# EAGLE board esplash (EAGLE 9.6.2)
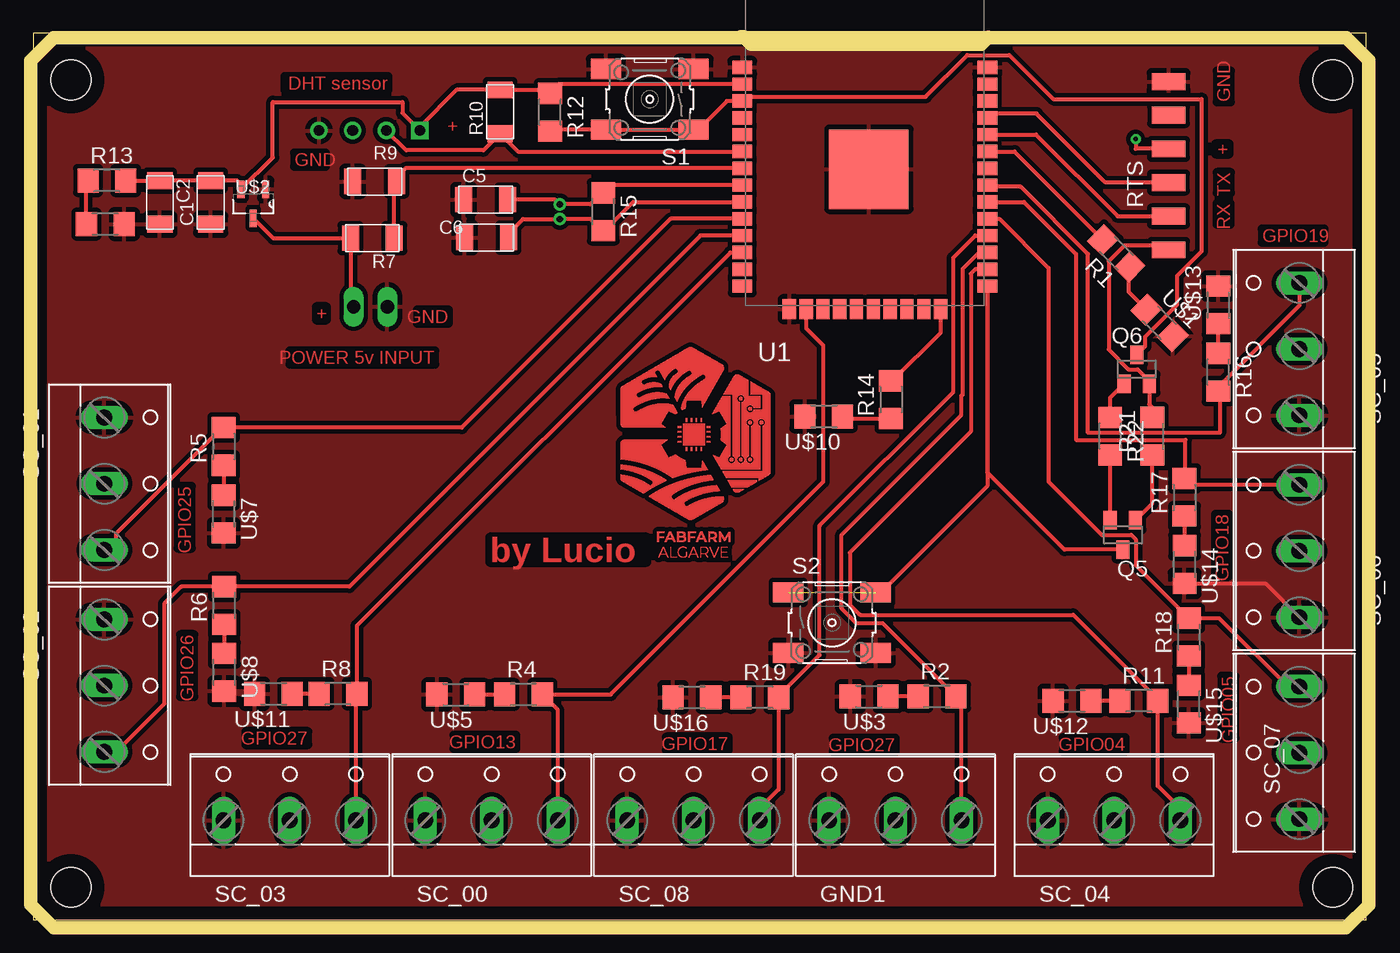
[diagram p0: board, top side]
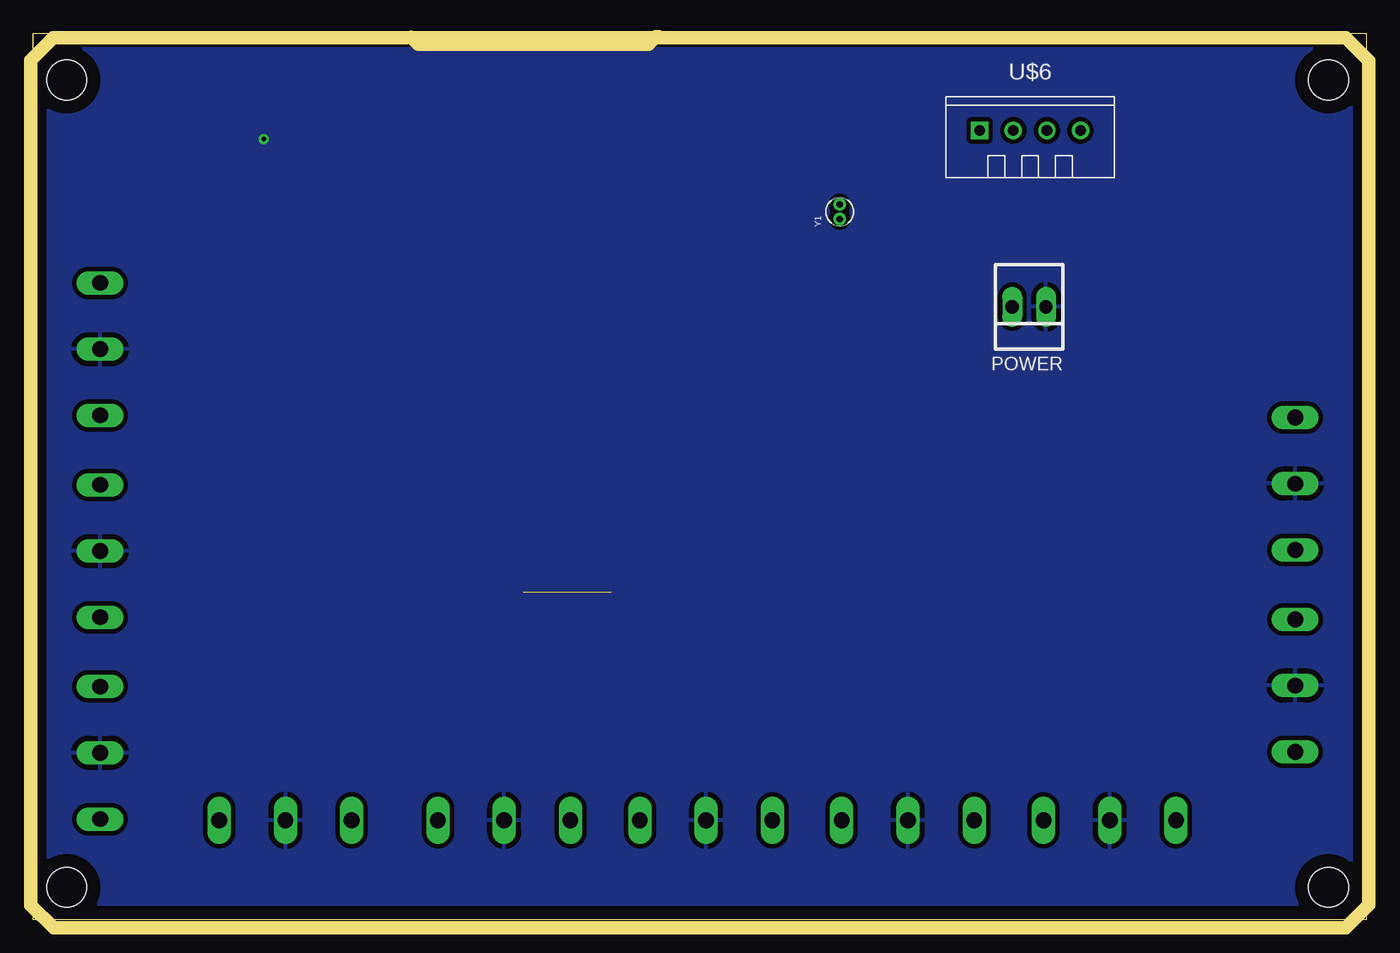
[diagram p1: board, bottom side, seen from below]

Size 100.64 x 66.94 mm. Coordinates in mm from the lower left corner, seen from the top.
Outline: 0,0 100.64,0 100.64,66.94 0,66.94 0,0
Copper layers (1*16): Top 0.035mm / dielectric 1.5mm / Bottom 0.035mm
Design rules "default *": minimum track width 12mil, minimum drill 0.35mm, track to track 13mil, track to pad 13mil, pad to pad 13mil, via to via 13mil, smd to smd 13mil, copper to edge 40mil, drill to drill 6mil, minimum pad ring 10mil, minimum via ring 8mil, stop-mask expansion 4mil, vias tented up to drill 0mil, thermal gap 15mil
Holes 3 mm at 2.86,63.41 98.11,63.41 98.11,2.45 2.86,2.44
Milling: 12 lines

## Footprints (pad centres in the part's own frame; a part is rotated, then mirrored left to right if it is on the bottom)
C1206FAB = smd 1.27 x 1.905: 1 -1.651,0; 2 1.651,0
W237-103 = drill 1.194 long: 1 -5,-1.29; 2 0,-1.29; 3 5,-1.29
22-23-2021 = drill 1 long: 1 -1.27,0; 2 1.27,0
SOT23 = smd 1 x 1.4: 1 -0.95,-1.1; 2 0.95,-1.1; 3 0,1.1
R1206 = smd 1.6 x 1.803: 1 -1.422,0; 2 1.422,0
R1206FAB = smd 1.27 x 1.905: 1 -1.651,0; 2 1.651,0
1X06SMD = smd 2.54 x 1.27: 1 0,6.35; 2 0,3.81; 3 0,1.27; 4 0,-1.27; 5 0,-3.81; 6 0,-6.35
6MM_SWITCH = smd 2.286 x 1.524: 1 -3.302,2.286; 2 3.302,2.286; 3 -3.302,-2.286; 4 3.302,-2.286
ESP-WROOM-32 = smd 1.5 x 1: 1 -9.25,7; 2 -9.25,5.73; 3 -9.25,4.46; 4 -9.25,3.19; 5 -9.25,1.92; 6 -9.25,0.65; 7 -9.25,-0.62; 8 -9.25,-1.89; 9 -9.25,-3.16; 10 -9.25,-4.43; 11 -9.25,-5.7; 12 -9.25,-6.97; 13 -9.25,-8.24; 14 -9.25,-9.51; 25 9.25,-9.51; 26 9.25,-8.24; 27 9.25,-6.97; 28 9.25,-5.7; 29 9.25,-4.43; 30 9.25,-3.16; 31 9.25,-1.89; 32 9.25,-0.62; 33 9.25,0.65; 34 9.25,1.92; 35 9.25,3.19; 36 9.25,4.46; 37 9.25,5.73; 38 9.25,7 | smd 1 x 1.5: 15 -5.7,-11.25; 16 -4.43,-11.25; 17 -3.16,-11.25; 18 -1.89,-11.25; 19 -0.62,-11.25; 20 0.65,-11.25; 21 1.92,-11.25; 22 3.19,-11.25; 23 4.46,-11.25; 24 5.73,-11.25 | smd 6 x 6: GND 0.3,-0.7
LED1206 = smd 1.6 x 1.803: 1 -1.422,0; 2 1.422,0
SOT95P237X112-3N = smd 1.321 x 0.559: 1 -1.092,0.94; 2 -1.092,-0.94 | smd 1.321 x 0.508: 3 1.092,0
TEMP-HUM-SENSOR-DHT11 = drill 0.8 square: 1 -3.81,0 | drill 0.8: 2 -1.27,0; 3 1.27,0; 4 3.81,0
XTAL_ECS-.327-12.5-13X = drill 0.46 pad 0.86: 1 -0.55,0; 2 0.55,0

## Placement (x,y rotation side)
C1  100nF  [C1206FAB]  13.41,54.16 90 top
C2  100uF  [C1206FAB]  9.57,54.16 270 top
C5  15pf  [C1206FAB]  34.15,54.38 0 top
C6  15pf  [C1206FAB]  34.23,51.5 0 top
GND1  SC  [W237-103]  65.09,8.8 0 top
POWER  22-23-2021  [22-23-2021]  25.46,46.28 180 bottom
Q5  BCX70SMD  [SOT23]  82.25,29.06 180 top
Q6  BCX70SMD  [SOT23]  83.31,41.57 0 top
R1  100ohm  [R1206]  81.76,50.33 135 top
R2  100ohm  [R1206]  68.24,16.87 0 top
R4  100ohm  [R1206]  37.01,17.02 0 top
R5  100ohm  [R1206]  14.39,35.74 90 top
R6  100ohm  [R1206]  14.42,23.73 90 top
R7  1.2Mohm  [R1206FAB]  25.61,51.46 180 top
R8  100ohm  [R1206]  23.01,17.07 0 top
R9  1.5Mohm  [R1206FAB]  25.78,55.74 0 top
R10  10K  [R1206FAB]  35.25,61 90 top
R11  100ohm  [R1206]  83.46,16.54 0 top
R12  10k  [R1206]  39.02,60.97 270 top
R13  100ohm  [R1206]  5.57,55.82 0 top
R14  100ohm  [R1206]  64.76,39.28 90 top
R15  10k  [R1206]  43.04,53.46 270 top
R16  100ohm  [R1206]  89.46,41.35 270 top
R17  100ohm  [R1206]  86.91,31.9 90 top
R18  100ohm  [R1206]  87.23,21.34 90 top
R19  100ohm  [R1206]  54.86,16.81 0 top
R21  10k  [R1206]  84.47,36.51 90 top
R22  10k  [R1206]  81.3,36.51 270 top
RTS  FTDI-SMD-HEADER  [1X06SMD]  85.71,56.93 0 top
S1  Reset  [6MM_SWITCH]  46.54,61.95 180 top
S2  GPIO0 Button  [6MM_SWITCH]  60.31,22.43 0 top
SC_00  SC  [W237-103]  34.61,8.8 0 top
SC_01  SC  [W237-103]  6.67,32.93 270 top
SC_02  SC  [W237-103]  6.67,17.69 270 top
SC_03  SC  [W237-103]  19.37,8.8 0 top
SC_04  SC  [W237-103]  81.6,8.8 0 top
SC_05  SC  [W237-103]  94.3,43.09 90 top
SC_06  SC  [W237-103]  94.3,27.85 90 top
SC_07  SC  [W237-103]  94.3,12.61 90 top
SC_08  SC  [W237-103]  49.85,8.8 0 top
U1  ESP-WROOM-32  [ESP-WROOM-32]  62.78,57.36 0 top
U$1  LED  [LED1206]  85.02,45.08 315 top
U$2  MCP1700T-3302E/TT  [SOT95P237X112-3N]  16.61,54.06 270 top
U$3  LED  [LED1206]  63.1,16.86 180 top
U$5  LED  [LED1206]  31.9,17.01 180 top
U$6  TEMP-HUM-SENSOR-DHT11  [TEMP-HUM-SENSOR-DHT11]  25.39,59.6 0 bottom
U$7  LED  [LED1206]  14.39,30.64 270 top
U$8  LED  [LED1206]  14.43,18.69 270 top
U$9  LED  [LED1206]  5.45,52.52 0 top
U$10  LED  [LED1206]  59.68,38.01 180 top
U$11  LED  [LED1206]  18.14,17.07 180 top
U$12  LED  [LED1206]  78.41,16.54 180 top
U$13  LED  [LED1206]  89.46,46.43 90 top
U$14  LED  [LED1206]  86.92,26.82 270 top
U$15  LED  [LED1206]  87.22,16.29 270 top
U$16  LED  [LED1206]  49.72,16.8 180 top
Y1  ECS-.327-12.5-13X  [XTAL_ECS-.327-12.5-13X]  39.75,53.46 90 bottom

## Library data of the parts
C1 C2 C5 C6 R1 R2 R4-R19 R21 R22 RTS S1 S2 U$1 U$3 U$5 U$7-U$16 = fab
GND1 SC_00 SC_01-SC_08 = con-wago-500; MPN: 237-103; OC_FARNELL: unknown; OC_NEWARK: 18M7116
POWER = con-molex; MF: MOLEX; MPN: 22-23-2021; OC_FARNELL: 1462926; OC_NEWARK: 25C3832
Q5 Q6 = transistor
U1 = esp32
U$2 = MCP1700T-3302E_TT; ARROW_AMERICAS-PURCHASE-URL: https://snapeda.com/shop?store=Arrow+Americas&id=4791194; AVAILABILITY: Unavailable; DESCRIPTION: IC REG LINEAR 3.3V 250MA SOT23-3; DIGIKEY-PURCHASE-URL: https://snapeda.com/shop?store=DigiKey&id=4791194; MF: Microchip Technology; MOUSER-PURCHASE-URL: https://snapeda.com/shop?store=Mouser&id=4791194; MP: MCP1700T-3302E/TT; PACKAGE: None; PRICE: None
U$6 = diy-modules
Y1 = ECS-.327-12.5-13X; AVAILABILITY: Unavailable; DESCRIPTION: 32.768kHz ±20ppm Crystal 12.5pF 35 kOhms Cylindrical Can, Radial; MF: ECS Inc.; MP: ECS-.327-12.5-13X; PACKAGE: Cylindrical Can Radial ECS International; PRICE: None

## Nets
3V3: C1.2 C2.1 R10.2 R12.1 R13.2 U1.2 U$2.2 U$6.1
32K_XN: C6.2 R15.2 U1.9 Y1.1
32K_XP: C5.2 R15.1 U1.8 Y1.2
CHIP_PU: Q6.3 R12.2 S1.1 S1.2 U1.3
DTR: Q5.2 R22.2
GND: C1.1 C2.2 C5.1 C6.1 GND1.1 POWER.2 R9.1 RTS.1 S1.3 S1.4 S2.3 S2.4 SC_00.1 SC_01.1 SC_02.1 SC_03.1 SC_04.1 SC_05.1 SC_06.1 SC_07.1 SC_08.1 U1.1 U1.15 U1.38 U1.GND U$1.2 U$2.1 U$3.2 U$5.2 U$6.4 U$7.2 U$8.2 U$9.2 U$10.2 U$11.2 U$12.2 U$13.2 U$14.2 U$15.2 U$16.2
GPIO0: Q5.3 S2.1 S2.2 U1.25
GPIO1/TXD0: RTS.4 U1.35
GPIO02: R14.2 U1.24
GPIO3/RXD0: RTS.5 U1.34
GPIO4: R11.2 SC_04.3 U1.26
GPIO05/VALVE_RELAY07: R18.2 SC_07.3 U1.29
GPIO12: U1.14
GPIO13/PUMP_RELAY: R4.2 SC_00.3 U1.16
GPIO14: U1.13
GPIO15: U1.23
GPIO16/CURRENT_SENSE: GND1.3 R2.2 U1.27
GPIO17/VALVE_RELAY08: R19.2 SC_08.3 U1.28
GPIO18/VALVE_RELAY06: R17.2 SC_06.3 U1.30
GPIO19/VALVE_RELAY05: R16.2 SC_05.3 U1.31
GPIO21/VALVE_RELAY04: R1.2 U1.33
GPIO22: U1.36
GPIO23: U1.37
GPIO25/VALVE_RELAY01: R5.2 SC_01.3 U1.10
GPIO26/VALVE_RELAY02: R6.2 SC_02.3 U1.11
GPIO27/VALVE_RELAY03: R8.2 SC_03.3 U1.12
GPIO34/DHT: R10.1 U1.6 U$6.2
GPIO35/BATTVOLT: R7.1 R9.2 U1.7
GPIO36: U1.4
GPIO39: U1.5
N$2: R1.1 U$1.1
N$5: R2.1 U$3.1
N$10: R14.1 U$10.1
N$13: R4.1 U$5.1
N$15: R5.1 U$7.1
N$17: R6.1 U$8.1
N$19: R8.1 U$11.1
N$21: R11.1 U$12.1
N$23: R16.1 U$13.1
N$25: R13.1 U$9.1
N$26: Q5.1 R21.1
N$27: R17.1 U$14.1
N$29: R18.1 U$15.1
N$31: R19.1 U$16.1
N$34: Q6.1 R22.1
RTS: Q6.2 R21.2 RTS.6
VCC: GND1.2 POWER.1 R7.2 RTS.3 SC_00.2 SC_01.2 SC_02.2 SC_03.2 SC_04.2 SC_05.2 SC_06.2 SC_07.2 SC_08.2 U$2.3

## Tracks (layer width: path | path; a pad name or v marks a point on that pad's centre or on a via)
3V3
  Top 0.305: R13.2 C2.1 | C2.1 C1.2 15.39,55.81 15.67,55.53 U$2.2 18.08,57.56 18.08,61.73 27.89,61.73 27.89,60.9 U$6.1 29.2,59.89 31.97,62.66 R10.2 38.75,62.66 R12.1 39.71,63.09 U1.2 | C2.1
32K_XN
  Top 0.305: C6.2 35.88,51.82 36.98,52.91 Y1.1 42.06,52.91 42.94,52.04 R15.2 43.14,52.04 45.3,54.2 U1.9
32K_XP
  Top 0.305: U1.8 43.62,55.47 R15.1 42.94,54.89 42.06,54.01 Y1.2 39.39,54.38 C5.2
CHIP_PU
  Top 0.305: R12.2 39.13,59.67 S1.2 S1.1 50.22,59.67 52.38,61.82 U1.3 53.84,62.13 58.28,62.13 58.28,62.14 67.36,62.14 70.51,65.29 73.69,65.29 77.01,61.96 88.2,61.96 88.2,50.45 86.33,48.59 86.33,46.42 83.92,44.01 83.92,43.29 Q6.3
DTR
  Top 0.305: Q5.2 R22.2
GND
  Top 0.305: U$14.2 93.04,25.4 SC_06.1
  pour Top: -8.57,76.75 -8.57,-10.25 113.96,-10.25 113.96,76.75
GPIO0  (1 unrouted)
  Top 0.305: S2.2 63.99,24.71 72.03,32.75 U1.25 72.03,33.78 77.85,27.96 Q5.3
GPIO1/TXD0
  Top 0.305: 72.35,60.87 U1.35 72.35,60.87 | RTS.4 80.94,55.66 75.74,60.87 72.35,60.87
GPIO02
  Top 0.305: R14.2 64.86,40.7 68.51,44.35 U1.24
GPIO3/RXD0
  Top 0.305: U1.34 75.71,59.28 81.86,53.12 RTS.5
GPIO4
  Top 0.305: U1.26 71.13,49.12 70.79,48.77 70.79,36.86 61.65,27.73 61.65,23.78 62.42,23.02 78.51,23.02 84.88,16.65 R11.2 84.88,10.11 86.6,8.4 SC_04.3
GPIO05/VALVE_RELAY07
  Top 0.305: SC_07.3 94.69,17.61 89.53,22.77 R18.2 83.23,26.76 83.23,28.72 82.89,29.06 80.66,29.06 76.65,33.08 76.65,49.21 72.93,52.93 U1.29
GPIO13/PUMP_RELAY
  Top 0.305: U1.16 58.35,44.66 59.64,43.37 59.64,33.06 43.6,17.02 R4.2 39.61,15.84 SC_00.3
GPIO16/CURRENT_SENSE
  Top 0.305: GND1.3 70.09,16.44 R2.2 64.14,22.39 62.15,22.39 61.02,23.52 61.02,29.06 70.07,38.11 70.07,39.56 70.15,39.64 70.15,49.13 71.4,50.39 U1.27
GPIO17/VALVE_RELAY08
  Top 0.305: U1.28 71.12,51.66 69.45,49.98 69.45,39.84 59.36,29.75 59.36,19.99 56.28,16.91 R19.2 56.28,9.84 54.85,8.4 SC_08.3
GPIO18/VALVE_RELAY06
  Top 0.305: SC_06.3 86.98,32.85 86.98,33.39 | 86.98,33.39 86.98,36.24 78.72,36.24 78.72,50.26 74.79,54.2 U1.30 | R17.2 86.98,33.39
GPIO19/VALVE_RELAY05
  Top 0.305: SC_05.3 95.59,46.37 89.56,40.35 89.56,39.82 | 89.56,39.82 89.56,36.76 79.63,36.76 79.63,50.27 74.55,55.35 72.03,55.35 U1.31 | R16.2 89.56,39.82
GPIO21/VALVE_RELAY04
  Top 0.305: U1.33 74.08,58.01 R1.2 | R1.2
GPIO25/VALVE_RELAY01
  Top 0.305: SC_01.3 6.27,27.93 6.27,29.15 14.28,37.17 R5.2 32.36,37.17 48.12,52.93 U1.10
GPIO26/VALVE_RELAY02
  Top 0.305: U1.11 50.37,51.66 23.87,25.16 R6.2 11.18,25.16 9.89,23.87 9.89,16.31 6.27,12.69 SC_02.3
GPIO27/VALVE_RELAY03
  Top 0.305: U1.12 52.62,50.39 24.43,22.2 R8.2 24.37,17 24.37,8.4 SC_03.3
GPIO34/DHT
  Top 0.305: U1.6 36.6,58.01 R10.1 33.99,58.09 28.16,58.09 U$6.2
GPIO35/BATTVOLT
  Top 0.305: U1.7 28.11,56.74 27.43,56.06 R9.2 27.26,55.57 R7.1
N$2
  Top 0.305: U$1.1 82.7,47.4 82.7,49.25 R1.1 | U$1.1 | R1.1
N$5
  Top 0.305: R2.1 U$3.1
N$10
  Top 0.305: U$10.1 60.9,37.85 R14.1
N$13
  Top 0.305: U$5.1 R4.1
N$15
  Top 0.305: R5.1 U$7.1
N$17
  Top 0.305: R6.1 14.43,22.3 U$8.1
N$19
  Top 0.305: R8.1 U$11.1
N$21
  Top 0.305: R11.1 U$12.1
N$23
  Top 0.305: R16.1 U$13.1
N$25
  Top 0.305: U$9.1 4.02,55.69 R13.1
N$26
  Top 0.305: Q5.1 84.47,31.43 R21.1
N$27
  Top 0.305: R17.1 U$14.1
N$29
  Top 0.305: R18.1 U$15.1 | U$15.1
N$31
  Top 0.305: R19.1 U$16.1
N$34
  Top 0.305: R22.1 81.3,39.42 Q6.1
RTS
  Top 0.305: R21.2 84.47,38.69 84.26,38.91 Q6.2 84.26,40.67 83.37,41.55 82.69,41.55 81.19,43.05 81.19,49.72 82.37,50.9 85.39,50.9 RTS.6
VCC  (via drill 0.35)
  Top 0.305: POWER.1 23.96,46.52 R7.2 18.12,51.46 U$2.3 | v83.22,58.94 83.22,58.2 RTS.3
  pour Bottom: -8.04,80.06 110.32,80.06 110.32,-10.25 -8.04,-10.25
(copper drawn outside any net)
  shapes: Top area x14404

## Text on the board
Top: DHT sensor | GND | + | + | GND | TX | RX | GPIO19 | GND | + | POWER 5v INPUT | GPIO25 | GPIO18 | by Lucio | GPIO26 | GPIO05 | GPIO27 | GPIO13 | GPIO17 | GPIO27 | GPIO04